# Altium PCB CROSS-FPGA.PcbDoc
Units mil, origin at the board's own origin, x right, y up, seen from the top; angles counter-clockwise.
Board outline 2799.24 x 2101.82 mil, 2 copper layers (Top Layer, Top, Bottom Layer, Bottom); 28 components, 31 nets, 209 pads, 15 vias.
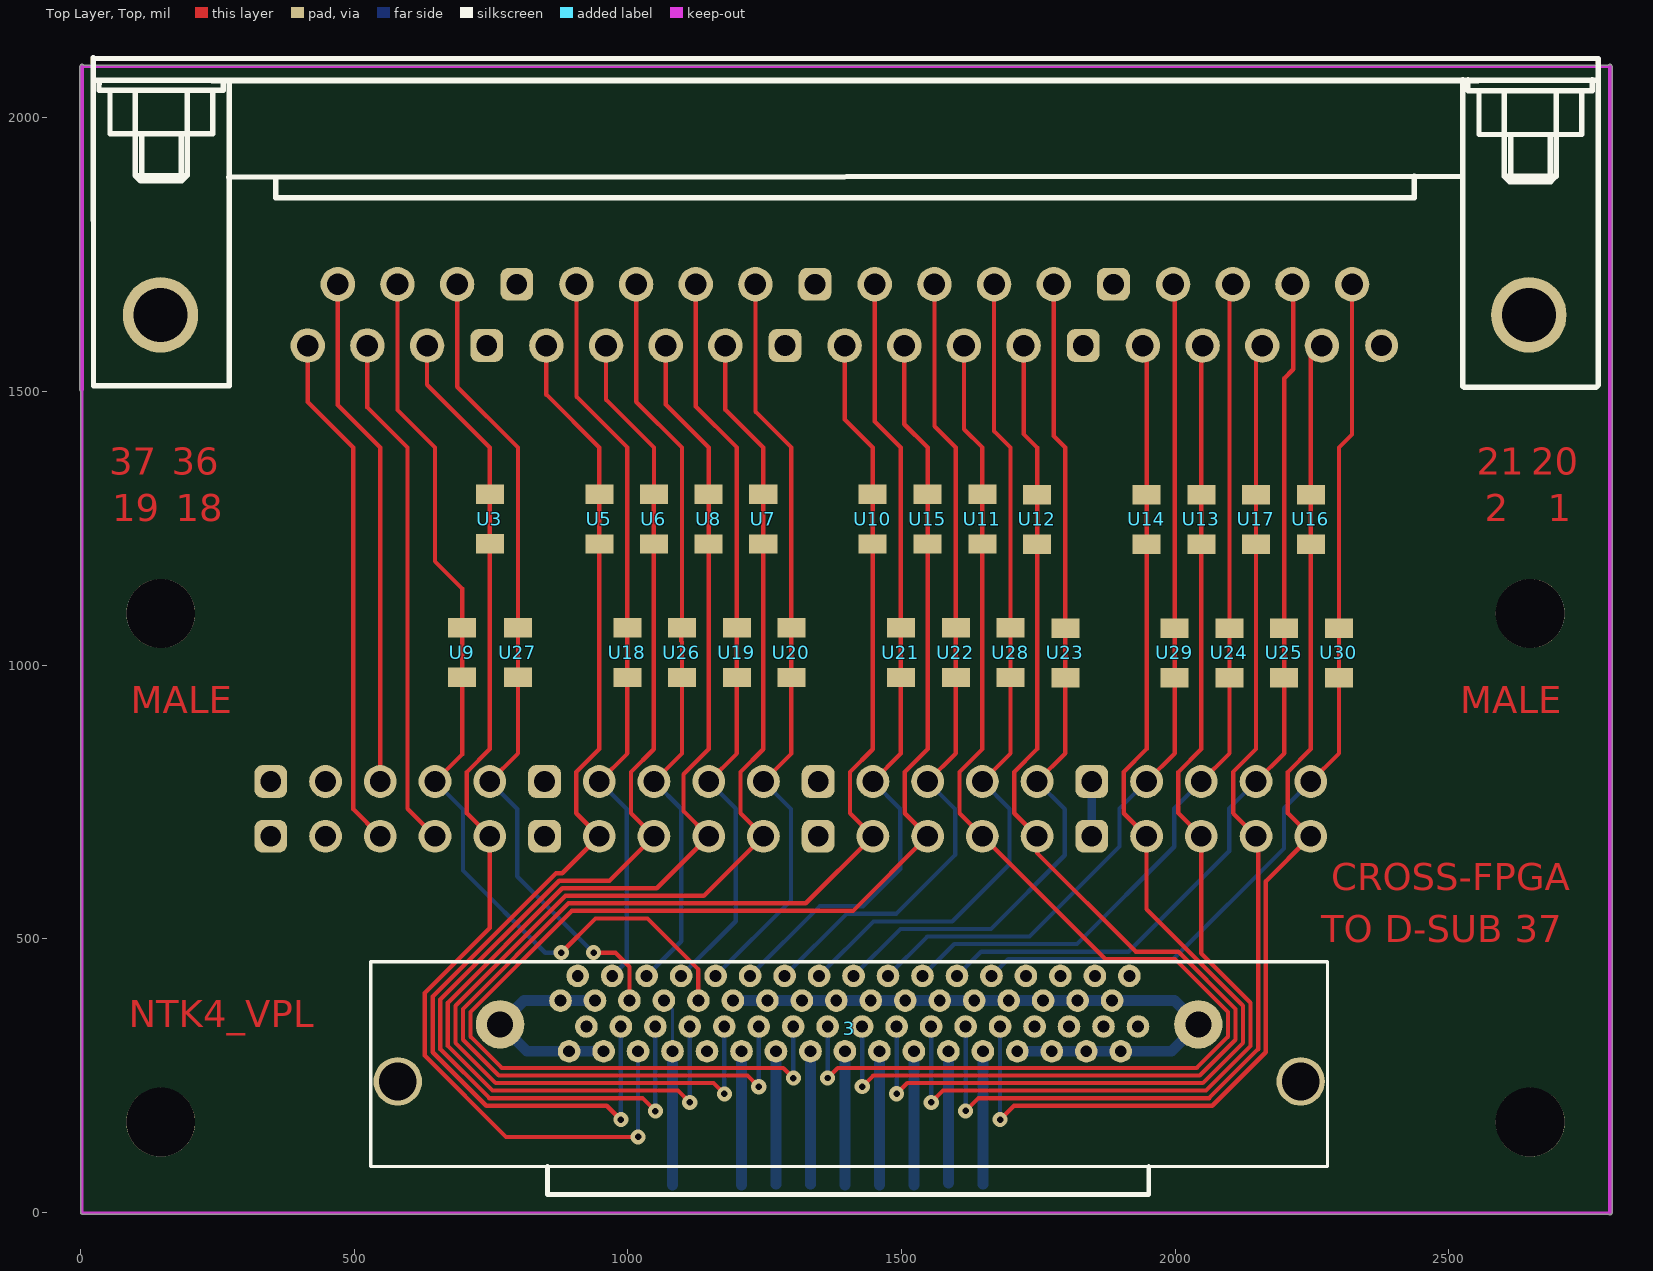
[diagram p0: Top Layer, Top view]
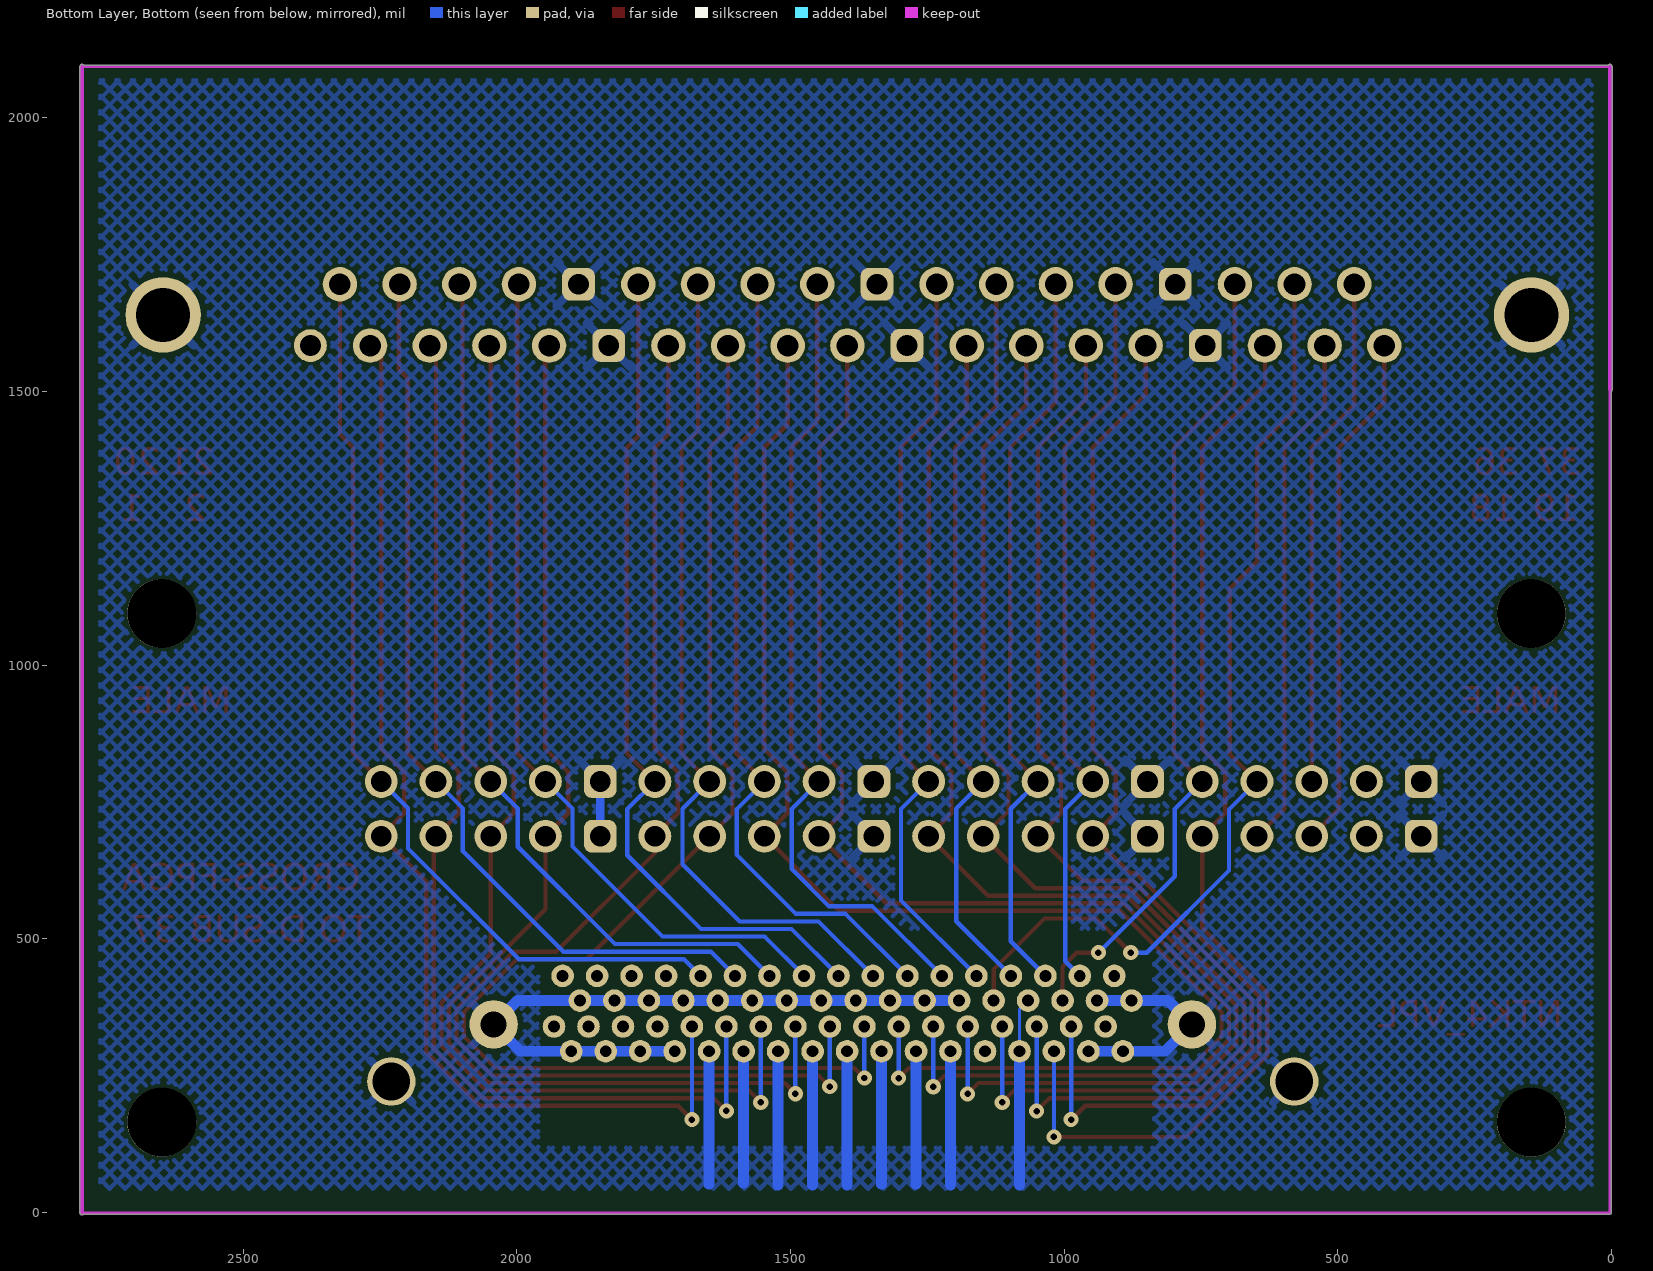
[diagram p1: Bottom Layer, Bottom view, seen from below]

## Layer stack, top to bottom
Top Solder, Top Mask: solder mask 0.4, Solder Resist, Dk 3.5
Top Layer, Top: signal copper 1.4
Dielectric 1: dielectric 12.6, FR-4, Dk 4.8
Bottom Layer, Bottom: signal copper 1.4
Bottom Solder, Bot Mask: solder mask 0.4, Solder Resist, Dk 3.5

## Board outline
0.21,0 0.21,1500.49 cw(c2.72,1503.54) -1.23,1503.54 -1.23,2093.94 cw(c2.72,2093.94) 5.77,2096.45 2791.01,2096.45 cw(c2794.06,2093.94) 2798.01,2093.94 2798.01,0 cw(c2794.06,0) 2791.01,-2.52 2.72,-2.52 cw(c2.72,0)

## Design rules (kind name [scope] priority, off if disabled: settings)
Clearance "Clearance_Top Layer, Top_PadToPad" [ExistsOnLayer('Top Layer, Top') And IsPad vs ExistsOnLayer('Top Layer, Top') And IsPad] p1: gap=5.91
Clearance "Clearance_Top Layer, Top_PadToLine" [ExistsOnLayer('Top Layer, Top') And IsPad vs ExistsOnLayer('Top Layer, Top') And IsWire] p2: gap=5.91
Clearance "Clearance_Top Layer, Top_LineToLine" [ExistsOnLayer('Top Layer, Top') And IsWire vs ExistsOnLayer('Top Layer, Top') And IsWire] p3: gap=5.91
Clearance "Clearance_Top Layer, Top_ViaToPad" [ExistsOnLayer('Top Layer, Top') And IsVia vs ExistsOnLayer('Top Layer, Top') And IsPad] p4: gap=5.91
Clearance "Clearance_Top Layer, Top_ViaToLine" [ExistsOnLayer('Top Layer, Top') And IsVia vs ExistsOnLayer('Top Layer, Top') And IsWire] p5: gap=5.91
Clearance "Clearance_Top Layer, Top_ViaToVia" [ExistsOnLayer('Top Layer, Top') And IsVia vs ExistsOnLayer('Top Layer, Top') And IsVia] p6: gap=5.91
Clearance "Clearance_Bottom Layer, Bottom_PadToPad" [ExistsOnLayer('Bottom Layer, Bottom') And IsPad vs ExistsOnLayer('Bottom Layer, Bottom') And IsPad] p7: gap=5.91
Clearance "Clearance_Bottom Layer, Bottom_PadToLine" [ExistsOnLayer('Bottom Layer, Bottom') And IsPad vs ExistsOnLayer('Bottom Layer, Bottom') And IsWire] p8: gap=5.91
Clearance "Clearance_Bottom Layer, Bottom_LineToLine" [ExistsOnLayer('Bottom Layer, Bottom') And IsWire vs ExistsOnLayer('Bottom Layer, Bottom') And IsWire] p9: gap=5.91
Clearance "Clearance_Bottom Layer, Bottom_ViaToPad" [ExistsOnLayer('Bottom Layer, Bottom') And IsVia vs ExistsOnLayer('Bottom Layer, Bottom') And IsPad] p10: gap=5.91
Clearance "Clearance_Bottom Layer, Bottom_ViaToLine" [ExistsOnLayer('Bottom Layer, Bottom') And IsVia vs ExistsOnLayer('Bottom Layer, Bottom') And IsWire] p11: gap=5.91
Clearance "Clearance_Bottom Layer, Bottom_ViaToVia" [ExistsOnLayer('Bottom Layer, Bottom') And IsVia vs ExistsOnLayer('Bottom Layer, Bottom') And IsVia] p12: gap=5.91
Clearance Clearance_Design_HoleToHole [(IsVia Or IsThruPin) vs (IsVia Or IsThruPin)] p13: gap=13
Clearance [All] p14: gap=5.91
PlaneClearance [All] p1: clearance=10
PolygonConnect PolygonConnect_2 [IsPolygon And InNet('GND') And OnLayer('Bottom Layer, Bottom') vs IsVia] p1: connectstyle=Relief reliefconductorwidth=15 reliefentries=4 polygonreliefangle="45 Angle" airgapwidth=10
PolygonConnect PolygonConnect_1 [IsPolygon And InNet('GND') And OnLayer('Bottom Layer, Bottom') vs IsPad] p2: connectstyle=Relief reliefconductorwidth=15 reliefentries=4 polygonreliefangle="45 Angle" airgapwidth=10
PolygonConnect [All] p3: connectstyle=Relief reliefconductorwidth=10 reliefentries=4 polygonreliefangle="90 Angle" airgapwidth=10
RoutingVias [All] p1: holewidth=28 width=50 viastyle="Through Hole" minholewidth=28 minwidth=50 maxholewidth=28 maxwidth=50
SolderMaskExpansion [All] p1: expansion=4
Width [All] p1: maxlimit=39.37 minlimit=5 preferedwidth=10 minimp=50.000000 maximp=50.000000 favimp=50.000000
28 further rules are at their usual default settings.

## Components (designator, comment, footprint, x,y, rotation, side; value= is the part's Value field where it differs from the comment)
3 "" "VHDCI 68" 1916.11,432.68 r0 top
U3 "" SMD_0805 747.6,1267.32 r90 top
U5 "" SMD_0805 947.6,1266.93 r90 top
U6 "" SMD_0805 1047.21,1266.93 r90 top
U7 "" SMD_0805 1247.21,1266.93 r90 top
U8 "" SMD_0805 1147.6,1266.93 r90 top
U9 "" SMD_0805 697.01,1023.42 r90 top
U10 "" SMD_0805 1447.21,1266.93 r90 top
U11 "" SMD_0805 1647.6,1266.93 r90 top
U12 "" SMD_0805 1747.6,1266.53 r90 top
U13 "" SMD_0805 2047.6,1266.53 r90 top
U14 "" SMD_0805 1947.6,1266.53 r90 top
U15 "" SMD_0805 1547.6,1266.93 r90 top
U16 "" SMD_0805 2247.6,1266.53 r90 top
U17 "" SMD_0805 2147.6,1266.53 r90 top
U18 "" SMD_0805 998.98,1023.03 r90 top
U19 "" SMD_0805 1198.98,1023.03 r90 top
U20 "" SMD_0805 1298.59,1023.03 r90 top
U21 "" SMD_0805 1498.59,1023.03 r90 top
U22 "" SMD_0805 1598.98,1023.03 r90 top
U23 "" SMD_0805 1798.98,1022.64 r90 top
U24 "" SMD_0805 2098.98,1022.64 r90 top
U25 "" SMD_0805 2198.98,1022.64 r90 top
U26 "" SMD_0805 1098.59,1023.03 r90 top
U27 "" SMD_0805 798.98,1023.42 r90 top
U28 "" SMD_0805 1698.98,1023.03 r90 top
U29 "" SMD_0805 1998.98,1022.64 r90 top
U30 "" SMD_0805 2298.98,1022.64 r90 top

## Footprints (in the part's own frame and the unit in brackets; to place one, negate y for a bottom-side part, rotate by r counter-clockwise, add the part's x,y. Pads: shape width x height; smd on the part's side, far side on the other; paste and mask are expansions set on the pad)
SMD_0805 [mm]
  rect 0.9x1.3 smd: 1(-1.15,0) 2(1.15,0)
"VHDCI 68" [mm]
  round 1.05 hole 0.55: 1(0,0) 2(-0.8,-1.15) 3(-1.6,0) 4(-2.4,-1.15) 5(-3.2,0) 6(-4,-1.15) 7(-4.8,0) 8(-5.6,-1.15) 9(-6.4,0) 10(-7.2,-1.15) 11(-8,0) 12(-8.8,-1.15) 13(-9.6,0) 14(-10.4,-1.15) 15(-11.2,0) 16(-12,-1.15) 17(-12.8,0) 18(-13.6,-1.15) 19(-14.4,0) 20(-15.2,-1.15) 21(-16,0) 22(-16.8,-1.15) 23(-17.6,0) 24(-18.4,-1.15) 25(-19.2,0) 26(-20,-1.15) 27(-20.8,0) 28(-21.6,-1.15) 29(-22.4,0) 30(-23.2,-1.15) 31(-24,0) 32(-24.8,-1.15) 33(-25.6,0) 34(-26.4,-1.15) 35(0.4,-2.35) 36(-0.4,-3.5) 37(-1.2,-2.35) 38(-2,-3.5) 39(-2.8,-2.35) 40(-3.6,-3.5) 41(-4.4,-2.35) 42(-5.2,-3.5) 43(-6,-2.35) 44(-6.8,-3.5) 45(-7.6,-2.35) 46(-8.4,-3.5) 47(-9.2,-2.35) 48(-10,-3.5) 49(-10.8,-2.35) 50(-11.6,-3.5) 51(-12.4,-2.35) 52(-13.2,-3.5) 53(-14,-2.35) 54(-14.8,-3.5) 55(-15.6,-2.35) 56(-16.4,-3.5) 57(-17.2,-2.35) 58(-18,-3.5) 59(-18.8,-2.35) 60(-19.6,-3.5) 61(-20.4,-2.35) 62(-21.2,-3.5) 63(-22,-2.35) 64(-22.8,-3.5) 65(-23.6,-2.35) 66(-24.4,-3.5) 67(-25.2,-2.35) 68(-26,-3.5)
  round 2.25 hole 1.2: 69(3.2,-2.25) 71(-29.2,-2.25)
  round 2.25 hole 1.75: 70(7.95,-4.9) 72(-33.95,-4.9)
  silkscreen extent -35.2,-10.15 9.2,0.65

## Free pads (board coordinates)
  round 125.98 hole 125.98 unplated: 0(146.42,165.35) 0(146.42,1094.68) 0(2648.39,165.35) 0(2648.39,1094.68)
  rrect50% 60x60 hole 38: 0(347.53,687.72) 0(347.53,787.72) 0(847.53,687.72) 0(847.53,787.72) 0(1347.53,687.72) 0(1347.53,787.72) 0(1847.53,687.72) 0(1847.53,787.72) 6(1831.94,1584.25) 11(1286.94,1584.25) 16(741.94,1584.25) 24(1886.94,1696.25) 29(1341.94,1696.25) 34(796.94,1696.25)
  round 60 hole 38: 0(447.53,687.72) 0(447.53,787.72) 0(547.53,687.72) 0(547.53,787.72) 0(647.53,687.72) 0(647.53,787.72) 0(747.53,687.72) 0(747.53,787.72) 0(947.53,687.72) 0(947.53,787.72) 0(1047.53,687.72) 0(1047.53,787.72) 0(1147.53,687.72) 0(1147.53,787.72) 0(1247.53,687.72) 0(1247.53,787.72) 0(1447.53,687.72) 0(1447.53,787.72) 0(1547.53,687.72) 0(1547.53,787.72) 0(1647.53,687.72) 0(1647.53,787.72) 0(1747.53,687.72) 0(1747.53,787.72) 0(1947.53,687.72) 0(1947.53,787.72) 0(2047.53,687.72) 0(2047.53,787.72) 0(2147.53,687.72) 0(2147.53,787.72) 0(2247.53,687.72) 0(2247.53,787.72) 1(2376.94,1584.25)
  round 62.99 hole 39.37: 2(2267.94,1584.25) 3(2158.94,1584.25) 4(2049.94,1584.25) 5(1940.94,1584.25) 7(1722.94,1584.25) 8(1613.94,1584.25) 9(1504.94,1584.25) 10(1395.94,1584.25) 12(1177.94,1584.25) 13(1068.94,1584.25) 14(959.94,1584.25) 15(850.94,1584.25) 17(632.94,1584.25) 18(523.94,1584.25) 19(414.94,1584.25) 20(2322.94,1696.25) 21(2213.94,1696.25) 22(2104.94,1696.25) 23(1995.94,1696.25) 25(1777.94,1696.25) 26(1668.94,1696.25) 27(1559.94,1696.25) 28(1450.94,1696.25) 30(1232.94,1696.25) 31(1123.94,1696.25) 32(1014.94,1696.25) 33(905.94,1696.25) 35(687.94,1696.25) 36(578.94,1696.25) 37(469.94,1696.25)
  round 137.8 hole 98.43: 38(145.94,1640.25) 39(2645.94,1640.25)

## Via types
v1: diameter 27.56, hole 11.81, Top Layer, Top to Bottom Layer, Bottom, 15 vias

## Nets (pads, with @x,y where several pads share a name; then routed paths per layer and width w, separated by ;. In a path a pad name is that pad's centre, name@x,y a point inside that pad or via, vN(x,y) a via of type N, cw(c..) or ccw(c..) an arc to the next point about the centre after c; other vN are vias at no path point)
GND: 3.2 3.4 3.6 3.8 3.10 3.12 3.14 3.16 3.18 3.20 3.22 3.24 3.28 3.32 3.34 3.36 3.38 3.40 3.42 3.44 3.46 3.48 3.50 3.52 3.54 3.56 3.58 3.62 3.66 3.68 3.69 3.70 3.71 3.72 pad.0@347.53,687.72 pad.0@347.53,787.72 pad.0@847.53,687.72 pad.0@847.53,787.72 pad.0@1347.53,687.72 pad.0@1347.53,787.72 pad.0@1847.53,687.72 pad.0@1847.53,787.72 pad.6 pad.11 pad.16 pad.24 pad.29 pad.34 pad.38 pad.39 | length 4008.9
  Bottom Layer, Bottom w5: 3.28 1081.46,371.65 3.62
  Bottom Layer, Bottom w15.75: pad.0@1847.53,687.72 pad.0@1847.53,787.72
  Bottom Layer, Bottom w20: 3.32 3.34 809.81,387.4 3.71 815.72,294.88 3.68 3.66 ; 1081.46,50.9 3.62 ; 3.24 3.22 3.20 3.18 3.16 3.14 3.12 3.10 3.8 3.6 3.4 3.2 1998.79,387.4 3.69 1992.88,294.88 3.36 3.38 3.40 3.42 ; 1207.45,50.9 3.58 ; 1270.44,51.9 3.56 ; 1333.43,51.9 3.54 ; 1396.42,50.9 3.52 ; 1459.42,50.9 3.50 ; 1522.41,50.9 3.48 ; 1585.4,53.9 3.46 ; 1648.39,51.9 3.44
NET00000: pad.0@647.53,687.72 pad.18 | length 947.7
  Top Layer, Top w7.87: pad.18 523.94,1471.17 597.21,1397.9 597.21,738.03 pad.0@647.53,687.72
NET00001: pad.0@547.53,687.72 pad.19 | length 951.5
  Top Layer, Top w7.87: pad.19 414.94,1480.96 498,1397.9 498,737.24 pad.0@547.53,687.72
NET00002: pad.0@547.53,787.72 pad.37 | length 940.7
  Top Layer, Top w7.87: pad.37 469.94,1475.49 547.53,1397.9 pad.0@547.53,787.72
P0.0: 3.65 pad.0@947.53,687.72 pad.15 U5.1 U5.2 | length 2074.8
  Top Layer, Top w7.87: pad.15 850.94,1494.57 947.6,1397.9 U5.2 U5.1 947.6,847.05 905.68,805.12 905.68,729.57 pad.0@947.53,687.72 ; pad.0@936.11,687.72 pad.0@947.53,687.72 ; v1(986.97,169.88) 961.38,195.47 741.11,195.47 643.47,293.11 643.47,395.08 868.67,620.28 880.09,620.28 pad.0@947.53,687.72
  Bottom Layer, Bottom w7.87: v1(986.97,169.88) 3.65
P0.1: 3.31 pad.0@947.53,787.72 pad.33 U18.1 U18.2 | length 1355.3
  Top Layer, Top w7.87: pad.33 905.94,1490.94 998.98,1397.9 U18.1 998.98,839.17 pad.0@947.53,787.72
  Bottom Layer, Bottom w7.87: pad.0@947.53,787.72 997.8,737.44 997.8,459.25 3.31
P0.2: 3.63 pad.0@1047.53,687.72 pad.14 U6.1 U6.2 | length 2176.9
  Top Layer, Top w7.87: pad.14 959.94,1485.49 1047.53,1397.9 1047.53,1312.52 U6.2 U6.1 1047.21,846.65 1005.68,805.12 1005.68,729.57 1047.53,687.72 966.31,606.5 874.38,606.5 657.25,389.37 657.25,298.82 746.82,209.25 1026.54,209.25 v1(1050.16,185.63)
  Bottom Layer, Bottom w7.87: 1049.97,201.57 1049.97,212.2 ; 3.63 1049.97,212.2 ; v1(1050.16,185.63) 1050.16,212.01 1049.97,212.2
P0.3: 3.29 pad.0@1047.53,787.72 pad.32 U26.1 U26.2 | length 1367.4
  Top Layer, Top w7.87: pad.32 1014.94,1481.55 1098.59,1397.9 U26.2 1097.21,1066.93 1097.21,1044.29 1098.59,1042.91 U26.1 1098.59,838.78 pad.0@1047.53,787.72
  Bottom Layer, Bottom w7.87: 3.29 1097.41,495.87 1097.41,737.83 pad.0@1047.53,787.72
P0.4: 3.61 pad.0@1147.53,687.72 pad.13 U8.1 U8.2 | length 2272.2
  Top Layer, Top w7.87: pad.13 1068.94,1476.57 1147.6,1397.9 U8.2 U8.1 1147.6,847.05 1101.6,801.04 1101.6,733.65 1147.53,687.72 1052.53,592.72 880.09,592.72 671.03,383.66 671.03,304.53 752.53,223.03 1091.31,223.03 v1(1112.96,201.38)
  Bottom Layer, Bottom w7.87: v1(1112.96,201.38) 3.61
P0.5: 3.27 pad.0@1147.53,787.72 pad.31 U19.1 U19.2 | length 1377.8
  Top Layer, Top w7.87: pad.31 1123.94,1472.94 1198.98,1397.9 U19.1 1198.98,839.17 pad.0@1147.53,787.72
  Bottom Layer, Bottom w7.87: 3.27 1197.01,532.48 1197.01,738.23 pad.0@1147.53,787.72
P0.6: 3.59 pad.0@1247.53,687.72 pad.12 U7.1 U7.2 | length 2394.2
  Top Layer, Top w7.87: v1(1176.15,217.13) 1156.46,236.81 758.23,236.81 684.81,310.24 684.81,377.95 885.79,578.94 1138.75,578.94 1247.53,687.72 1205.68,729.57 1205.68,805.12 1247.21,846.65 U7.1 U7.2 1247.21,1397.9 1177.94,1467.17 pad.12
  Bottom Layer, Bottom w7.87: 3.59 1175.95,239.76 ; 1175.95,239.76 1176.15,239.57 v1(1176.15,217.13) 1176.15,225 1175.95,225.2 1175.95,239.76
P0.7: 3.25 pad.0@1247.53,787.72 pad.30 U20.1 U20.2 | length 1389.7
  Top Layer, Top w7.87: pad.30 1232.94,1463.55 1298.59,1397.9 U20.2 U20.1 1298.59,838.78 pad.0@1247.53,787.72
  Bottom Layer, Bottom w7.87: 3.25 1297.8,570.28 1297.8,737.44 pad.0@1247.53,787.72
P1.0: 3.57 pad.0@1447.53,687.72 pad.10 U10.1 U10.2 | length 2574.2
  Top Layer, Top w7.87: v1(1238.94,230.12) 1218.47,250.59 763.94,250.59 698.59,315.94 698.59,372.24 891.5,565.16 1324.97,565.16 1447.53,687.72 1405.68,729.57 1405.68,805.12 1447.21,846.65 U10.1 U10.2 1447.21,1397.9 1395.94,1449.17 pad.10
  Bottom Layer, Bottom w7.87: v1(1238.94,230.12) 3.57
P1.1: 3.23 pad.0@1447.53,787.72 pad.28 U21.1 U21.2 | length 1485.3
  Top Layer, Top w7.87: pad.0@1447.53,787.72 1498.59,838.78 U21.1 1498.59,1397.9 1450.94,1445.55 pad.28
  Bottom Layer, Bottom w7.87: 3.23 1350.16,559.65 1429.49,559.65 1497.6,627.76 1497.6,737.64 pad.0@1447.53,787.72
P1.2: 3.55 pad.0@1547.53,687.72 pad.9 U15.1 U15.2 | length 2677.5
  Top Layer, Top w7.87: v1(1302.13,245.87) 1283.63,264.37 769.65,264.37 712.37,321.65 712.37,366.53 897.21,551.38 1411.19,551.38 1547.53,687.72 1505.68,729.57 1505.68,805.12 1547.6,847.05 U15.1 U15.2 1547.6,1397.9 1504.94,1440.57 pad.9
  Bottom Layer, Bottom w7.87: 3.55 1301.94,246.06 v1(1302.13,245.87)
P1.3: 3.21 pad.0@1547.53,787.72 pad.27 U22.1 U22.2 | length 1504
  Top Layer, Top w7.87: pad.0@1547.53,787.72 1598.98,839.17 U22.1 1598.98,1397.9 1559.94,1436.94 pad.27
  Bottom Layer, Bottom w7.87: 3.21 1399.38,545.87 1489.93,545.87 1597.8,653.74 1597.8,737.44 pad.0@1547.53,787.72
P1.4: 3.53 pad.0@1647.53,687.72 pad.8 U11.1 U11.2 | length 2428.5
  Top Layer, Top w7.87: v1(1364.93,246.06) 1383.23,264.37 2038.94,264.37 2096.23,321.65 2096.23,366.53 1999.57,463.19 1872.05,463.19 1647.53,687.72 1605.68,729.57 1605.68,805.12 1647.6,847.05 U11.1 U11.2 1647.53,1312.28 1647.53,1397.9 1613.94,1431.49 pad.8
  Bottom Layer, Bottom w7.87: v1(1364.93,246.06) 3.53
P1.5: 3.19 pad.0@1647.53,787.72 pad.26 U28.1 U28.2 | length 1546.5
  Top Layer, Top w7.87: pad.0@1647.53,787.72 1698.98,839.17 U28.1 1698.98,1397.9 1668.94,1427.94 pad.26
  Bottom Layer, Bottom w7.87: 3.19 1448.59,532.09 1592.68,532.09 1697.21,636.61 1697.21,738.03 pad.0@1647.53,787.72
P1.6: 3.51 pad.0@1747.53,687.72 pad.7 U12.1 U12.2 | length 2336.1
  Top Layer, Top w7.87: v1(1428.12,230.31) 1448.39,250.59 2044.65,250.59 2110.01,315.94 2110.01,372.24 2005.28,476.97 1927.72,476.97 1747.53,657.16 1747.53,687.72 1705.68,729.57 1705.68,805.12 1747.6,847.05 U12.1 U12.2 1747.53,1311.89 1747.53,1397.9 1722.94,1422.49 pad.7
  Bottom Layer, Bottom w7.87: 3.51 1427.92,234.45 1428.12,234.25 v1(1428.12,230.31)
P1.7: 3.17 pad.0@1747.53,787.72 pad.25 U23.1 U23.2 | length 1571.3
  Top Layer, Top w7.87: pad.0@1747.53,787.72 1798.98,839.17 U23.1 1798.98,1397.9 1777.94,1418.94 pad.25
  Bottom Layer, Bottom w7.87: 3.17 1497.8,518.31 1663.35,518.31 1798,652.95 1798,737.24 pad.0@1747.53,787.72
P2.0: 3.49 pad.0@1947.53,687.72 pad.5 U14.1 U14.2 | length 2178.7
  Top Layer, Top w7.87: v1(1490.91,217.32) 1510.4,236.81 2050.36,236.81 2123.79,310.24 2123.79,377.95 1947.53,554.21 1947.53,687.72 1905.68,729.57 1905.68,805.12 1947.6,847.05 U14.1 U14.2 1947.6,1397.9
  Top Layer, Top w8: pad.5 1947.6,1577.58 1947.6,1397.9
  Bottom Layer, Bottom w7.87: v1(1490.91,217.32) 3.49
P2.1: 3.15 pad.0@1947.53,787.72 pad.23 U29.1 U29.2 | length 1591.1
  Top Layer, Top w7.87: pad.0@1947.53,787.72 1998.98,839.17 U29.1 1998.98,1693.2 pad.23
  Bottom Layer, Bottom w7.87: 3.15 1547.01,504.53 1733.63,504.53 1898.2,669.09 1898.2,738.39 pad.0@1947.53,787.72
P2.2: 3.47 pad.0@2047.53,687.72 pad.4 U13.1 U13.2 | length 2117.5
  Top Layer, Top w7.87: v1(1554.1,201.57) 1575.56,223.03 2056.07,223.03 2137.57,304.53 2137.57,383.66 2047.53,473.7 2047.53,687.72 2005.68,729.57 2005.68,805.12 2047.6,847.05 U13.1 U13.2 2047.53,1311.89 2047.53,1581.84 pad.4
  Bottom Layer, Bottom w7.87: 3.47 1553.9,213.58 1554.1,213.39 v1(1554.1,201.57)
P2.3: 3.13 pad.0@2047.53,787.72 pad.22 U24.1 U24.2 | length 1629.7
  Top Layer, Top w7.87: pad.0@2047.53,787.72 2098.98,839.17 U24.1 2098.98,1690.3 pad.22
  Bottom Layer, Bottom w7.87: 3.13 1596.23,490.75 1820.44,490.75 1998.2,668.5 1998.2,738.39 pad.0@2047.53,787.72
P2.4: 3.45 pad.0@2147.53,687.72 pad.3 U17.1 U17.2 | length 2062
  Top Layer, Top w7.87: v1(1616.9,185.83) 1640.32,209.25 2061.78,209.25 2151.34,298.82 2151.34,683.9 2147.53,687.72 2105.68,729.57 2105.68,805.12 2147.6,847.05 U17.1 U17.2 2147.6,1572.92 pad.3
  Bottom Layer, Bottom w7.87: v1(1616.9,185.83) 3.45
P2.5: 3.11 pad.0@2147.53,787.72 pad.21 U25.1 U25.2 | length 1676.6
  Top Layer, Top w7.87: pad.0@2147.53,787.72 2198.98,839.17 U25.1 U25.2 2198.98,1524.28 2215.6,1540.9 2215.6,1694.59 pad.21
  Bottom Layer, Bottom w7.87: 3.11 1645.44,476.97 1914.93,476.97 2098.39,660.43 2098.39,738.58 pad.0@2147.53,787.72
P2.6: 3.43 pad.0@2247.53,687.72 pad.2 U16.1 U16.2 | length 2074.6
  Top Layer, Top w7.87: v1(1680.09,170.08) 1705.48,195.47 2067.49,195.47 2165.12,293.11 2165.12,605.31 2247.53,687.72 2205.68,729.57 2205.68,805.12 2247.6,847.05 U16.1 U16.2 2247.53,1311.89 2247.53,1563.84 pad.2
  Bottom Layer, Bottom w7.87: 3.43 1679.89,170.28 v1(1680.09,170.08)
P2.7: 3.9 pad.0@2247.53,787.72 pad.20 U30.1 U30.2 | length 1713.2
  Top Layer, Top w7.87: pad.0@2247.53,787.72 2298.98,839.17 U30.1 U30.2 2298.98,1397.9 2322.94,1421.85 pad.20
  Bottom Layer, Bottom w7.87: 3.9 1694.65,463.19 1996.42,463.19 2198.59,665.35 2198.59,738.78 pad.0@2247.53,787.72
PFI1: 3.26 pad.0@647.53,787.72 pad.36 U9.1 U9.2 | length 1775.5
  Top Layer, Top w7.87: pad.36 578.94,1466.49 647.53,1397.9 647.53,1189.97 697.01,1140.48 U9.1 697.01,837.2 pad.0@647.53,787.72 ; v1(878.12,475) 940.72,537.6 1035.6,537.6 1128.71,444.49 3.26
  Bottom Layer, Bottom w7.87: pad.0@647.53,787.72 698.59,736.65 698.59,625.2 848.79,475 v1(878.12,475)
PFI2: 3.64 pad.0@747.53,687.72 pad.17 U3.1 U3.2 | length 2036.8
  Top Layer, Top w7.87: pad.17 632.94,1512.57 747.6,1397.9 U3.2 U3.1 747.6,847.05 705.68,805.12 705.68,729.57 747.53,687.72 747.53,520 628.71,401.18 628.71,287.01 777.33,138.39 v1(1018.67,138.39)
  Bottom Layer, Bottom w7.87: 3.64 1018.47,138.58 v1(1018.67,138.39)
PFI3: 3.30 pad.0@747.53,787.72 pad.35 U27.1 U27.2 | length 1505.3
  Top Layer, Top w7.87: pad.35 687.94,1508.94 798.98,1397.9 U27.1 798.98,839.17 pad.0@747.53,787.72 ; v1(937.17,475) 977.13,475 1002.72,449.41 3.30
  Bottom Layer, Bottom w7.87: pad.0@747.53,787.72 797.8,737.44 797.8,614.37 v1(937.17,475)
pads on no net: 3.1 3.3 3.5 3.7 3.33 3.35 3.37 3.39 3.41 3.60 3.67

## Polygon pours and split planes (outlines as drawn)
GND on Bottom Layer, Bottom "Top Layer-No Net" (hatched 45Degree grid 20 track 8, remove dead copper, pour order 8): 35.6,43.9 35.6,2068.9 2760.6,2068.9 2760.6,43.9 35.6,43.9

## Keep-outs
Keep-Out Layer, Board:
  lines w5: 2.72,1818.5 2.72,0 2794.06,0 ; 2.72,2093.94 2794.06,2093.94
  lines w7.87: 2.72,1503.54 2.72,2093.94 ; 2794.06,0 2794.06,2093.94

## Other copper
Top Layer, Top:
  text "37" at 52.47,1348.47 h49.21
  text "36" at 166.47,1348.47 h49.21
  text "21" at 2550.47,1348.47 h49.21
  text "20" at 2650.47,1348.47 h49.21
  text "19" at 57.6,1263.47 h49.21
  text "18" at 173.6,1263.47 h49.21
  text "2" at 2565.47,1263.47 h49.21
  text "1" at 2680.47,1263.47 h49.21
  text "MALE" at 91.6,912.9 h49.21
  text "MALE" at 2520.6,912.9 h49.21
  text "CROSS-FPGA" at 2284.6,588.9 h49.21
  text "TO D-SUB 37" at 2266.6,493.9 h49.21
  text "NTK4_VPL" at 87.6,338.9 h49.21
Bottom Layer, Bottom:
  pour cut-out: 835.6,518.9 835.6,118.9 1960.6,118.9 1960.6,518.9

## Silkscreen, mask and mechanical layers (free items; w line width, h text height)
Top Overlay, Top Silk:
  lines w9.84: 23.35,2068.62 2772.88,2068.98 ; 23.35,2108.98 2772.88,2108.58 ; 23.35,2109.72 23.66,1511.01 271.66,1511.01 271.58,2067.87 ; 34.02,2069.37 33.66,2051.01 260.66,2051.01 260.91,2067.09 ; 53.66,2051.01 53.66,1971.01 241.66,1971.01 241.66,2051.01 ; 99.66,2051.01 99.66,1895.01 ; 111.66,1895.01 111.66,1971.01 ; 183.66,1895.01 183.66,1971.01 ; 194.66,2051.01 194.66,1895.01 ; 240.6,2068.37 2552.6,2068.37 ; 270.83,1891.97 2524.46,1893.5 ; 356.62,1892.24 356.6,1854.37 2436.6,1854.37 2436.74,1893.5 ; 2524.88,1509.83 2524.88,2069.83 ; 2527.6,1507.9 2768.6,1507.9 2772.88,1512.18 2772.88,2107.79 ; 2534.88,2069.83 2534.88,2049.83 2761.88,2049.83 2761.88,2069.83 ; 2554.88,2049.83 2554.88,1969.83 2742.88,1969.83 2742.88,2049.83 ; 2600.88,2049.83 2600.88,1893.83 ; 2612.88,1893.83 2612.88,1969.83 ; 2684.88,1893.83 2684.88,1969.83 ; 2695.88,2049.83 2695.88,1893.83 ; 99.66,1895.01 109.66,1885.01 184.66,1885.01 194.66,1895.01 ; 99.66,1895.01 194.66,1895.01 ; 2600.88,1893.83 2610.88,1883.83 2685.88,1883.83 2695.88,1893.83 ; 2600.88,1893.83 2695.88,1893.83